# Altium PCB FIT_High_Current_Backplane.pcbdoc
Units mm, origin at the board's own origin, x right, y up, seen from the top; angles counter-clockwise.
Board outline 423.76 x 36 mm, 2 copper layers (Top Layer, Bottom Layer), stack 1.54 mm thick; 64 components, 3 nets, 134 pads, 0 vias.
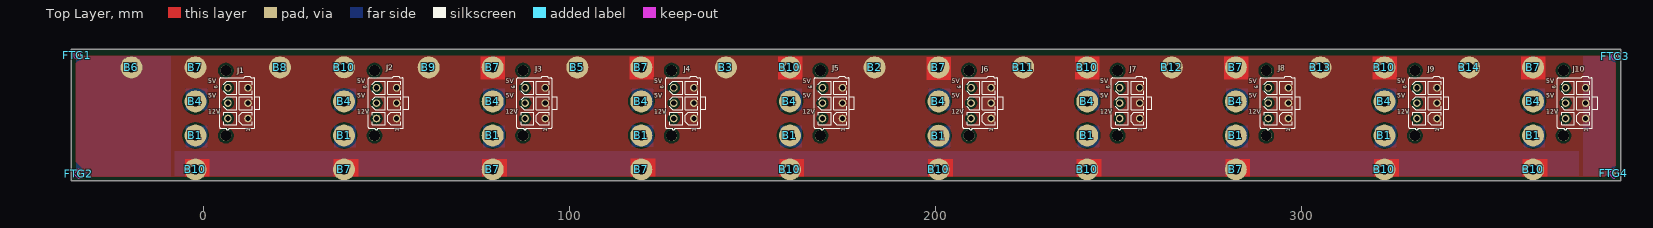
[diagram p0: Top Layer view]
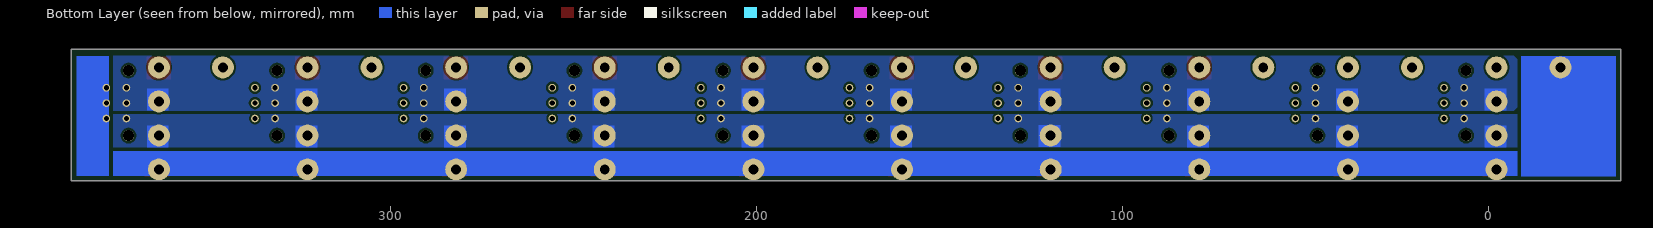
[diagram p1: Bottom Layer view, seen from below]
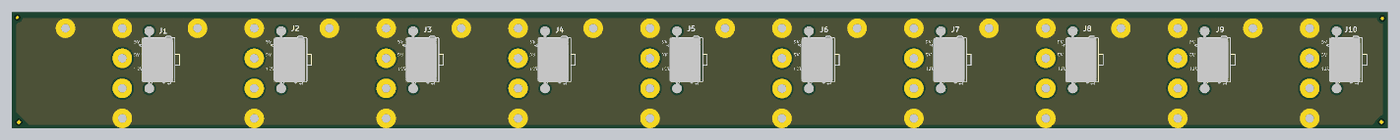
[diagram p2: 3D render of the assembled board from above, using the file's embedded part models]

## Layer stack, top to bottom
Top Solder: solder mask 0.01, Solder Resist, Dk 3.5
Top Layer: signal copper 0.12
Dielectric 6: core 1.3, FR-4, Dk 4.6
Bottom Layer: signal copper 0.12
Bottom Solder: solder mask 0.01, Solder Resist, Dk 3.5

## Board outline
-36.302,54.839 387.458,54.839 387.458,90.839 -36.302,90.839

## Design rules (kind name [scope] priority, off if disabled: settings)
Clearance Clearance_AC [InNetClass('AC')] p1: gap=2.5 ignorepadtopadclearanceinfootprint=FALSE
Clearance Clearance_NT [InComponent('NT*')] p2: gap=0 ignorepadtopadclearanceinfootprint=TRUE
Clearance Clearance_Poly [InPoly] p3: gap=0.6 ignorepadtopadclearanceinfootprint=FALSE
Clearance [All vs not HasFootprint('Net Tie')] p4: gap=0.127 ignorepadtopadclearanceinfootprint=FALSE except(0: Arc-Hole Track-Hole SMDPad-Hole THPad-Hole Via-Hole Fill-Hole Poly-Hole Region-Hole Text-Hole)
ComponentClearance ComponentClearance_pressfit [HasCompParameterValue('PressFit','Yes') vs InComponent('No Component')] p1: gap=5 collisioncheckmode=3 verticalgap=0.254 showdistances=FALSE
ComponentClearance ComponentClearance_NM [InComponentClass('NotMounted')] p2: gap=0 collisioncheckmode=3 verticalgap=0 showdistances=FALSE
ComponentClearance ComponentClearance_Top [not InComponentClass('Overlapping') and InComponentClass('Top Side Components') vs InComponentClass('Top Side Components')] p3: gap=0 collisioncheckmode=3 verticalgap=2540 showdistances=FALSE
ComponentClearance Overlapping [InComponentClass('Overlapping') vs InComponentClass('Overlapping')] p4: gap=0 collisioncheckmode=3 verticalgap=0 showdistances=FALSE
DiffPairsRouting [All] p1: maxlimit=0.2 minlimit=0.2 mostfreqgap=0.2 toplayer_minwidth=0.1 toplayer_maxwidth=0.1 toplayer_prefwidth=0.1 bottomlayer_minwidth=0.1 bottomlayer_maxwidth=0.1 bottomlayer_prefwidth=0.1 maxuncoupledlength=50
FabricationTestPointUsage TestPointUsage [All] p1: valid=0 allowmultiple=FALSE
FabricationTestpoint Testpoint [All] p1: side=3 testpointundercomponent=TRUE minsize=1.016 maxsize=2.54 preferedsize=1.524 minholesize=0 maxholesize=1.016 preferedholesize=0.813 testpointgrid=0.025 allowsidetop=TRUE allowsidebottom=TRUE usegrid=TRUE gridtolerance=0
Height [All] p1: minheight=0 maxheight=25 prefheight=10
HoleSize [All] p1: absolutevalues=TRUE maxlimit=5 minlimit=0.2 maxpercent=80.000 minpercent=20.000
HoleToHoleClearance [All] p1: gap=0.2 allowstackedmicrovias=TRUE
Length "Length CPCIs2a + XS" [InNetClass('CPCIs2a') or InxSignalClass('CPCIs2 XS')] p1: maxlimit=126 minlimit=121
Length "Length CPCIs5a + XS" [InNetClass('CPCIs5a')    or InxSignalClass('CPCIs5 XS')] p2: maxlimit=155.1 minlimit=151
MatchedLengths DiffPair_gbtclkm2c_MatchedLengths [InDifferentialPair ('FMCGBTCLKM2C_C1') Or InDifferentialPair ('FMCGBTCLKM2C_C0')] p1: tolerance=5 checknetsindiffpair=FALSE checkdiffpairvsdiffpair=TRUE checkxsignals=TRUE checkothers=TRUE
MatchedLengths DiffPair_gbtxClockDes_MatchedLengths [InDifferentialPair ('GBTXCLOCKDES_N0') Or InDifferentialPair ('GBTXCLOCKDES_P0') Or InDifferentialPair ('GBTXCLOCKDES_N1') Or InDifferentialPair ('GBTXCLOCKDES_P1')Or InDifferentialPair ('GBTXCLOCKDES_N2') Or InDifferentialPair ('GBTXCLOCKDES_P2')Or InDifferentialPair ('GBTXCLOCKDES_N3') Or InDifferentialPair ('GBTXCLOCKDES_P3') Or InDifferentialPair ('GBTXCLOCKDES_N4') Or InDifferentialPair ('GBTXCLOCKDES_P4')] p2: tolerance=5 checknetsindiffpair=FALSE checkdiffpairvsdiffpair=TRUE checkxsignals=TRUE checkothers=TRUE
MatchedLengths DiffPair_Scout_ScclkMatchedLengths [InDifferentialPair ('GBTXELINKSSCCLK') Or InDifferentialPair ('GBTXELINKSSCOUT')] p3: tolerance=5 checknetsindiffpair=FALSE checkdiffpairvsdiffpair=TRUE checkxsignals=TRUE checkothers=TRUE
MinimumAnnularRing MinimumAnnularRing_Via [IsVia] p1: minimumring=0.12
MinimumAnnularRing [All] p2: minimumring=0.12
MinimumSolderMaskSliver [IsThruPin vs IsThruPin] p1: minsoldermaskwidth=0.05
NetAntennae [All] p1 off: netantennaetolerance=0
PermittedLayers [All] p1: toplayerpermitted=TRUE bottomlayerpermitted=FALSE
PlaneClearance [All] p1: clearance=0.5
PlaneConnect [All] p1: planeconnectstyle=Direct reliefexpansion=0.3 reliefentries=4 reliefconductorwidth=0.5 reliefairgap=0.2
PolygonConnect [All] p1: connectstyle=Direct reliefconductorwidth=0.5 reliefentries=4 polygonreliefangle="90 Angle" airgapwidth=0.2
RoutingVias [All] p1: holewidth=0.3 width=0.65 viastyle="Through Hole" minholewidth=0.2 minwidth=0.45 maxholewidth=1 maxwidth=2
ShortCircuit ShortCircuit_NT [InComponent('J34') or  InComponent('J31') or InComponent('J30') or InComponent('J29') or InComponent('J33') or InComponent('J26') vs InComponent('NT*')] p1: allowed=TRUE
ShortCircuit [All] p2: allowed=FALSE
SilkToSilkClearance [All] p1: silktosilkclearance=0.05
SilkToSolderMaskClearance [IsPad] p1: minsilkscreentomaskgap=0.01 clearancetoexposedcopper=TRUE
SolderMaskExpansion [All] p1: expansion=0 istentingtop=FALSE
ViasUnderSMD ViasUnderSMD_1 [HasFootprint ('CAPC0603X33N')   or HasFootprint ('RESC1005X40N')  or HasFootprint('CAPC1608X87N')   or HasFootprint('CAPC1005X55N')   or  HasFootprint('Net Tie')] p1: allowed=TRUE
ViasUnderSMD [not InComponentClass('Overlapping')] p2: allowed=FALSE
Width Width_PWR [InNetClass('Power')] p1: maxlimit=1 minlimit=0.254 preferedwidth=0.4 minimp=50.000000 maximp=50.000000 favimp=50.000000
Width [All] p2: maxlimit=2.54 minlimit=0.127 preferedwidth=0.127
16 further rules are at their usual default settings.

## Classes and differential pairs
component class FIT_High_Current_Backplane: B1 B2 B3 B4 B5 B6 B7 B8 B9 B10 B11 B12 B13 B14 FTG1 FTG2 FTG3 FTG4 J1 J2 J3 J4 J5 J6 J7 J8 J9 J10

## Components (designator, comment, footprint, x,y, rotation, side; value= is the part's Value field where it differs from the comment)
B1 "Plated Hole" MTG270_500 322.818,67.239 r0 top locked
B1 "Plated Hole" MTG270_500 78.978,67.239 r0 top locked
B1 "Plated Hole" MTG270_500 160.258,67.239 r0 top locked
B1 "Plated Hole" MTG270_500 -2.302,67.239 r0 top locked
B1 "Plated Hole" MTG270_500 119.618,67.239 r0 top locked
B1 "Plated Hole" MTG270_500 282.178,67.239 r0 top locked
B1 "Plated Hole" MTG270_500 38.338,67.239 r0 top locked
B1 "Plated Hole" MTG270_500 363.458,67.239 r0 top locked
B1 "Plated Hole" MTG270_500 241.538,67.239 r0 top locked
B1 "Plated Hole" MTG270_500 200.898,67.169 r0 top locked
B2 "Plated Hole" MTG270_500 183.398,85.839 r0 top
B3 "Plated Hole" MTG270_500 142.758,85.839 r0 top
B4 "Plated Hole" MTG270_500 78.978,76.539 r0 top locked
B4 "Plated Hole" MTG270_500 -2.302,76.539 r0 top locked
B4 "Plated Hole" MTG270_500 119.618,76.539 r0 top locked
B4 "Plated Hole" MTG270_500 38.338,76.539 r0 top locked
B4 "Plated Hole" MTG270_500 241.538,76.539 r0 top locked
B4 "Plated Hole" MTG270_500 282.178,76.539 r0 top locked
B4 "Plated Hole" MTG270_500 322.818,76.539 r0 top locked
B4 "Plated Hole" MTG270_500 160.258,76.539 r0 top locked
B4 "Plated Hole" MTG270_500 363.458,76.539 r0 top locked
B4 "Plated Hole" MTG270_500 200.898,76.539 r0 top locked
B5 "Plated Hole" MTG270_500 102.118,85.839 r0 top
B6 "Plated Hole" MTG270_500 -19.802,85.839 r0 top
B7 "Plated Hole" MTG270_500 38.338,57.939 r0 top locked
B7 "Plated Hole" MTG270_500 119.618,85.839 r0 top locked
B7 "Plated Hole" MTG270_500 78.978,85.839 r0 top locked
B7 "Plated Hole" MTG270_500 -2.302,85.839 r0 top locked
B7 "Plated Hole" MTG270_500 363.458,85.839 r0 top locked
B7 "Plated Hole" MTG270_500 78.978,57.939 r0 top locked
B7 "Plated Hole" MTG270_500 282.178,85.839 r0 top locked
B7 "Plated Hole" MTG270_500 119.618,57.939 r0 top locked
B7 "Plated Hole" MTG270_500 282.178,57.939 r0 top locked
B7 "Plated Hole" MTG270_500 200.898,85.839 r0 top locked
B8 "Plated Hole" MTG270_500 20.838,85.839 r0 top
B9 "Plated Hole" MTG270_500 61.478,85.839 r0 top
B10 "Plated Hole" MTG270_500 38.338,85.852 r0 top locked
B10 "Plated Hole" MTG270_500 322.818,85.839 r0 top locked
B10 "Plated Hole" MTG270_500 200.898,57.939 r0 top locked
B10 "Plated Hole" MTG270_500 322.818,57.939 r0 top locked
B10 "Plated Hole" MTG270_500 -2.302,57.939 r0 top locked
B10 "Plated Hole" MTG270_500 160.258,57.939 r0 top locked
B10 "Plated Hole" MTG270_500 241.538,85.839 r0 top locked
B10 "Plated Hole" MTG270_500 363.458,57.939 r0 top locked
B10 "Plated Hole" MTG270_500 241.538,57.939 r0 top locked
B10 "Plated Hole" MTG270_500 160.258,85.839 r0 top locked
B11 "Plated Hole" MTG270_500 224.038,85.839 r0 top
B12 "Plated Hole" MTG270_500 264.678,85.839 r0 top
B13 "Plated Hole" MTG270_500 305.318,85.839 r0 top
B14 "Plated Hole" MTG270_500 345.958,85.839 r0 top
FTG1 "Use only in PCB" FIDUCIAL_TOP_C100-200 -34.646,89.179 r90 top locked
FTG2 "Use only in PCB" FIDUCIAL_TOP_S100-200 -34.188,56.769 r90 top locked
FTG3 "Use only in PCB" FIDUCIAL_TOP_C100-200 385.851,88.9 r90 top locked
FTG4 "Use only in PCB" FIDUCIAL_TOP_S100-200 385.572,56.845 r90 top locked
J1 "Mini-Fit Jr.™" MOLEX_46010-0611 6.568,76.069 r90 top locked
J2 "Mini-Fit Jr.™" MOLEX_46010-0611 47.208,76.069 r90 top locked
J3 "Mini-Fit Jr.™" MOLEX_46010-0611 87.848,76.069 r90 top locked
J4 "Mini-Fit Jr.™" MOLEX_46010-0611 128.488,76.069 r90 top locked
J5 "Mini-Fit Jr.™" MOLEX_46010-0611 169.128,76.069 r90 top locked
J6 "Mini-Fit Jr.™" MOLEX_46010-0611 209.768,76.069 r90 top locked
J7 "Mini-Fit Jr.™" MOLEX_46010-0611 250.408,76.069 r90 top locked
J8 "Mini-Fit Jr.™" MOLEX_46010-0611 291.048,76.069 r90 top locked
J9 "Mini-Fit Jr.™" MOLEX_46010-0611 331.688,76.069 r90 top locked
J10 "Mini-Fit Jr.™" MOLEX_46010-0611 372.328,76.069 r90 top locked

## Footprints (in the part's own frame and the unit in brackets; to place one, negate y for a bottom-side part, rotate by r counter-clockwise, add the part's x,y. Pads: shape width x height; smd on the part's side, far side on the other; paste and mask are expansions set on the pad)
FIDUCIAL_TOP_C100-200 [mm] "Round Fiducial Target, Top Layer, 1.0mm, Top Solder 2.0mm, Keepout =2.0mm"
  round 1 smd paste-0.51 mask+0.5: FTG2(0,0)
  Top Layer keep-out circle w0.1: c0,0 r1
FIDUCIAL_TOP_S100-200 [mm] "Square Fiducial Target, Top Layer, 1.0mm, Top Solder 2.0mm, Keepout =2.0mm"
  rect 1x1 smd rot 45 paste-0.51 mask+0.5: 1(0,0)
  Top Layer keep-out region: 1.414,0 0,-1.414 -1.414,0 0,1.414
MOLEX_46010-0611 [mm] "4.20mm (.165\") Pitch Mini-Fit Jr. plug, Dual Row, Vertical, without Snap-in Plastic Peg PCB Lock, 6 Circuits"
  round 2.1 hole 1.4: 1(-4.2,-5.5) 2(0,-5.5) 3(4.2,-5.5) 4(-4.2,0) 5(0,0) 6(4.2,0)
  round 3 hole 3 unplated: 17(-8.9,0.56) 17(8.9,0.56)
  silkscreen extent -7.3,-8.75 7.3,2.25, body extent -9.9,-6.74 9.9,2.86, height 11.35
MTG270_500 [mm] "Plated Through Hole: Hole Dia.=2.7mm Pad Dia.=5.0mm"
  round 6 hole 2.7: 1(0,0)

## Part data
B1 B1 B1 B1 B1 B1 B1 B1 B1 B1 B2 B3 B4 B4 B4 B4 B4 B4 B4 B4 B4 B4 B5 B6 B7 B7 B7 B7 B7 B7 B7 B7 B7 B7 B8 B9 B10 B10 B10 B10 B10 B10 B10 B10 B10 B10 B11 B12 B13 B14: library part PLATED_HOLE2.7_PAD5.0, "Single Terminal Socket", Author="CERN DEM JMW", Component Type="Standard (No BOM)", ComponentHeight=0mm, CreateDate=27.09.2011, Family="Plated Hole", HelpURL=Undefined, LatestRevisionDate=27.09.2011, Mounted=No, PackageDescription="Plated Through Hole: Hole Dia.=2.7mm Pad Dia.=5.0mm", Part Description="Plated Through Hole: Hole Dia.=2.7mm Pad Dia.=5.0mm", Part Number=PLATED_HOLE2.7_PAD5.0, Pin Count=1, Sense=No, SMD=No, Socket=No, Status=None
FTG1 FTG3: library part FIDUCIAL_TARGET_C100-200, "Fiducial Target", Author="CERN DEM JLC", Component Type="Standard (No BOM)", ComponentHeight=0mm, CreateDate=09.02.2010, Family=Fiducial, HelpURL=Undefined, LatestRevisionDate=04.04.2012, Mounted=No, PackageDescription="Round Fiducial Target, Top Layer, 1.0mm, Top Solder 2.0mm, Keepout =2.0mm", Part Description="Round Fiducial Target, Top Layer, 1.0mm, Top Solder 2.0mm, Keepout =2.0mm", Part Number=FIDUCIAL_TARGET_C100-200, Pin Count=1, Sense=No, SMD=Yes, Socket=No, Status=None
FTG2 FTG4: library part FIDUCIAL_TARGET_S100-200, "Fiducial Target", Author="CERN DEM JLC", Component Type="Standard (No BOM)", ComponentHeight=0mm, CreateDate=09.02.2010, Family=Fiducial, HelpURL=Undefined, LatestRevisionDate=04.04.2012, Mounted=No, PackageDescription="Square Fiducial Target, Top Layer, 1.0mm, Top Solder 2.0mm, Keepout =2.0mm", Part Description="Square Fiducial Target, Top Layer, 1.0mm, Top Solder 2.0mm, Keepout =2.0mm", Part Number=FIDUCIAL_TARGET_S100-200, Pin Count=1, Sense=No, SMD=Yes, Socket=No, Status=None
J1 J2 J3 J4 J5 J6 J7 J8 J9 J10: library part MOLEX_46010-0611, "4.20mm (.165\") Pitch Mini-Fit Jr.™ Plug, Dual Row, Vertical, without Snap-in Plastic Peg PCB Lock, 4 Circuits", Manufacturer=MOLEX, Manufacturer Part Number=46010-0611, Author=GK, Component Type=Standard, ComponentHeight=13.1mm, CreateDate=12.03.2009, Family="Mini-Fit Jr.™", HelpURL=\\cern.ch\dfs\Applications\Altium\Datasheets\MOLEX_39-28-1043.pdf, LatestRevisionDate=06.03.2012, Mounted=Yes, Part Description="4.20mm (.165\") Pitch Mini-Fit Jr.™ Plug, Dual Row, Vertical, without Snap-in Plastic Peg PCB Lock, 4 Circuits", Part Number=MOLEX_46010-0611, Pin Count=6, PressFit=No, Sense=No, SMD=No, Socket=No, Status=None

## Nets (pads, with @x,y where several pads share a name; then routed paths per layer and width w, separated by ;. In a path a pad name is that pad's centre, name@x,y a point inside that pad or via, vN(x,y) a via of type N, cw(c..) or ccw(c..) an arc to the next point about the centre after c; other vN are vias at no path point)
GND: B2.1 B3.1 B5.1 B6.1 B7.1 B8.1 B9.1 B10.1 B11.1 B12.1 B13.1 B14.1 J1.1 J1.2 J1.3 J2.1 J2.2 J2.3 J3.1 J3.2 J3.3 J4.1 J4.2 J4.3 J5.1 J5.2 J5.3 J6.1 J6.2 J6.3 J7.1 J7.2 J7.3 J8.1 J8.2 J8.3 J9.1 J9.2 J9.3 J10.1 J10.2 J10.3
P5V0: B4.1 J1.5 J1.6 J2.5 J2.6 J3.5 J3.6 J4.5 J4.6 J5.5 J5.6 J6.5 J6.6 J7.5 J7.6 J8.5 J8.6 J9.5 J9.6 J10.5 J10.6
P12V0: B1.1 J1.4 J2.4 J3.4 J4.4 J5.4 J6.4 J7.4 J8.4 J9.4 J10.4
pads on no net: FTG1.FTG2 FTG2.1 FTG3.FTG2 FTG4.1 J1.17 J2.17 J3.17 J4.17 J5.17 J6.17 J7.17 J8.17 J9.17 J10.17

## Polygon pours and split planes (outlines as drawn)
P5V0 on Bottom Layer "NONET_L-01_P-001" (solid, remove dead copper, pour order 0): -7,74 376,74 376,89 -7,89 -8,88 -8,75
P12V0 on Bottom Layer "NONET_L-01_P-001" (solid, remove dead copper, pour order 1): -8,64 376,64 376,73 -8,73
GND on Top Layer "NONET_L-01_P-001" (solid, pour order 2): 384,89 386,87 386,59 383,56 -31,56 -35,60 -35,87 -33,89

## Other copper
Top Layer:
  rectangle net GND: 360.18,82.5 366.88,88.8
  rectangle net GND: 319.54,82.5 326.24,88.8
  rectangle net GND: 278.9,82.5 285.6,88.8
  rectangle net GND: 238.26,82.5 244.96,88.8
  rectangle net GND: 197.62,82.334 204.32,88.634
  rectangle net GND: 156.98,82.541 163.68,88.841
  rectangle net GND: 116.34,82.5 123.04,88.8
  rectangle net GND: 75.7,82.5 82.4,88.8
  rectangle net GND: 360.558,56 367.36,60.8
  rectangle net GND: 319.918,56 326.72,60.8
  rectangle net GND: 279.278,56 286.08,60.8
  rectangle net GND: 238.638,56 245.44,60.8
  rectangle net GND: 197.998,56 204.8,60.8
  rectangle net GND: 157.358,56 164.16,60.8
  rectangle net GND: 116.718,56.07 123.52,60.87
  rectangle net GND: 76.078,56 82.88,60.8
  rectangle net GND: 35.438,56 42.24,60.8
  rectangle net GND: -5.202,56 1.6,60.8
Bottom Layer:
  rectangle net GND: -35,56 -9,89
  rectangle net GND: 377.086,56.171 386,89
  rectangle net GND: -8,56.171 376,63
  rectangle net P5V0: 360.76,74 366.76,80
  rectangle net P12V0: 360.76,64 366.76,70
  rectangle net P5V0: 320.12,74 326.12,80
  rectangle net P12V0: 320.12,64 326.12,70
  rectangle net P5V0: 279.48,74 285.48,80
  rectangle net P12V0: 279.48,64 285.48,70
  rectangle net P5V0: 238.84,74 244.84,80
  rectangle net P12V0: 238.84,64 244.84,70
  rectangle net P5V0: 198.2,74 204.2,80
  rectangle net P12V0: 198.2,64 204.2,70
  rectangle net P5V0: 157.56,74 163.56,80
  rectangle net P12V0: 157.56,64 163.56,70
  rectangle net P5V0: 116.92,74.07 122.92,80.07
  rectangle net P12V0: 116.92,64.07 122.92,70.07
  rectangle net P5V0: 76.28,74 82.28,80
  rectangle net P12V0: 76.28,64 82.28,70
  rectangle net P5V0: 35.64,74 41.64,80
  rectangle net P12V0: 35.64,64 41.64,70
  rectangle net P12V0: -5,64 1,70
  rectangle net P5V0: -5,74 1,80

## Silkscreen, mask and mechanical layers (free items; w line width, h text height)
Top Overlay:
  text "5V" at 1.24,81.16 h2
  text "5V" at 41.88,81.16 h2
  text "5V" at 82.52,81.16 h2
  text "5V" at 123.16,81.16 h2
  text "5V" at 163.8,81.16 h2
  text "5V" at 204.44,81.16 h2
  text "5V" at 245.08,81.16 h2
  text "5V" at 285.72,81.16 h2
  text "5V" at 326.36,81.16 h2
  text "5V" at 367,81.16 h2
  text "5V" at 1.24,77.145 h2
  text "5V" at 41.88,77.145 h2
  text "5V" at 82.52,77.145 h2
  text "5V" at 123.16,77.145 h2
  text "5V" at 163.8,77.145 h2
  text "5V" at 204.44,77.145 h2
  text "5V" at 245.08,77.145 h2
  text "5V" at 285.72,77.145 h2
  text "5V" at 326.36,77.145 h2
  text "5V" at 367,77.145 h2
  text "12V" at 1.24,72.735 h2
  text "12V" at 41.88,72.735 h2
  text "12V" at 82.52,72.735 h2
  text "12V" at 123.16,72.735 h2
  text "12V" at 163.8,72.735 h2
  text "12V" at 204.44,72.735 h2
  text "12V" at 245.08,72.735 h2
  text "12V" at 285.72,72.735 h2
  text "12V" at 326.36,72.735 h2
  text "12V" at 367,72.735 h2
Bottom Paste:
  text ".Layer_Name" at 168.705,-40.005 h1.91
Bottom Solder:
  rectangle: 366.383,0.603 585.179,2.4
  rectangle: 325.743,0.603 544.539,2.4
  rectangle: 285.103,0.603 503.899,2.4
  rectangle: 244.463,0.603 463.259,2.4
  rectangle: 203.823,0.603 422.619,2.4
  rectangle: 163.183,0.603 381.979,2.4
  rectangle: 122.543,0.673 341.339,2.47
  rectangle: 81.903,0.603 300.699,2.4
  rectangle: 41.263,0.603 260.059,2.4
  rectangle: 0.623,0.603 219.419,2.4
  region: 206.037,51.755 206.037,48.255 220,48.255 220,51.755
  text ".Layer_Name" at 168.705,-37.465 h1.91
Mechanical 1:
  drawing of 198 lines, arcs and shapes, not listed
  text "Layer" at 42.601,119.101 h1.52
  text "Name" at 53.013,119.101 h1.52
  text "Material" at 76.628,119.101 h1.52
  text "Thickness" at 98.466,119.101 h1.52
  text "Constant" at 114.972,119.101 h1.52
  text "Board Layer Stack" at 129.446,119.101 h1.52
  text "Top Overlay" at 53.013,116.053 h1.52
  text "Top Solder" at 53.013,113.005 h1.52
  text "Solder Resist" at 76.628,113.005 h1.52
  text "0.010mm" at 98.466,113.005 h1.52
  text "3.5" at 114.972,113.005 h1.52
  text "1" at 42.601,109.957 h1.52
  text "Top Layer" at 53.013,109.957 h1.52
  text "0.120mm" at 98.466,109.957 h1.52
  text "Dielectric 6" at 53.013,106.909 h1.52
  text "FR-4" at 76.628,106.909 h1.52
  text "1.300mm" at 98.466,106.909 h1.52
  text "4.6" at 114.972,106.909 h1.52
  text "2" at 42.601,103.861 h1.52
  text "Bottom Layer" at 53.013,103.861 h1.52
  text "0.120mm" at 98.466,103.861 h1.52
  text "Bottom Solder" at 53.013,100.813 h1.52
  text "Solder Resist" at 76.628,100.813 h1.52
  text "0.010mm" at 98.466,100.813 h1.52
  text "3.5" at 114.972,100.813 h1.52
  text "Bottom Overlay" at 53.013,97.765 h1.52
Mechanical 13:
  text "RPS-400-12 or EPP-400-12" at 67.691,-13.995 h2.54

## Text inside footprints (layer, text, board x,y; h text height)
J1: Top Overlay "6" at 3.834,80.036 h1 r90; Top Overlay "1" at 12.62,68.195 h1 r90; Mechanical 14 "6" at 3.834,80.036 h1 r90; Mechanical 14 "1" at 12.583,68.195 h1 r90
J2: Top Overlay "6" at 44.474,80.036 h1 r90; Top Overlay "1" at 53.26,68.195 h1 r90; Mechanical 14 "6" at 44.474,80.036 h1 r90; Mechanical 14 "1" at 53.223,68.195 h1 r90
J3: Top Overlay "6" at 85.114,80.036 h1 r90; Top Overlay "1" at 93.9,68.195 h1 r90; Mechanical 14 "6" at 85.114,80.036 h1 r90; Mechanical 14 "1" at 93.863,68.195 h1 r90
J4: Top Overlay "6" at 125.754,80.036 h1 r90; Top Overlay "1" at 134.54,68.195 h1 r90; Mechanical 14 "6" at 125.754,80.036 h1 r90; Mechanical 14 "1" at 134.503,68.195 h1 r90
J5: Top Overlay "6" at 166.394,80.036 h1 r90; Top Overlay "1" at 175.18,68.195 h1 r90; Mechanical 14 "6" at 166.394,80.036 h1 r90; Mechanical 14 "1" at 175.143,68.195 h1 r90
J6: Top Overlay "6" at 207.034,80.036 h1 r90; Top Overlay "1" at 215.82,68.195 h1 r90; Mechanical 14 "6" at 207.034,80.036 h1 r90; Mechanical 14 "1" at 215.783,68.195 h1 r90
J7: Top Overlay "6" at 247.674,80.036 h1 r90; Top Overlay "1" at 256.46,68.195 h1 r90; Mechanical 14 "6" at 247.674,80.036 h1 r90; Mechanical 14 "1" at 256.422,68.195 h1 r90
J8: Top Overlay "6" at 288.314,80.036 h1 r90; Top Overlay "1" at 297.1,68.195 h1 r90; Mechanical 14 "6" at 288.314,80.036 h1 r90; Mechanical 14 "1" at 297.062,68.195 h1 r90
J9: Top Overlay "6" at 328.954,80.036 h1 r90; Top Overlay "1" at 337.74,68.195 h1 r90; Mechanical 14 "6" at 328.954,80.036 h1 r90; Mechanical 14 "1" at 337.703,68.195 h1 r90
J10: Top Overlay "6" at 369.594,80.036 h1 r90; Top Overlay "1" at 378.38,68.195 h1 r90; Mechanical 14 "6" at 369.594,80.036 h1 r90; Mechanical 14 "1" at 378.343,68.195 h1 r90